# EAGLE board newbottomboard (EAGLE 9.4.1)
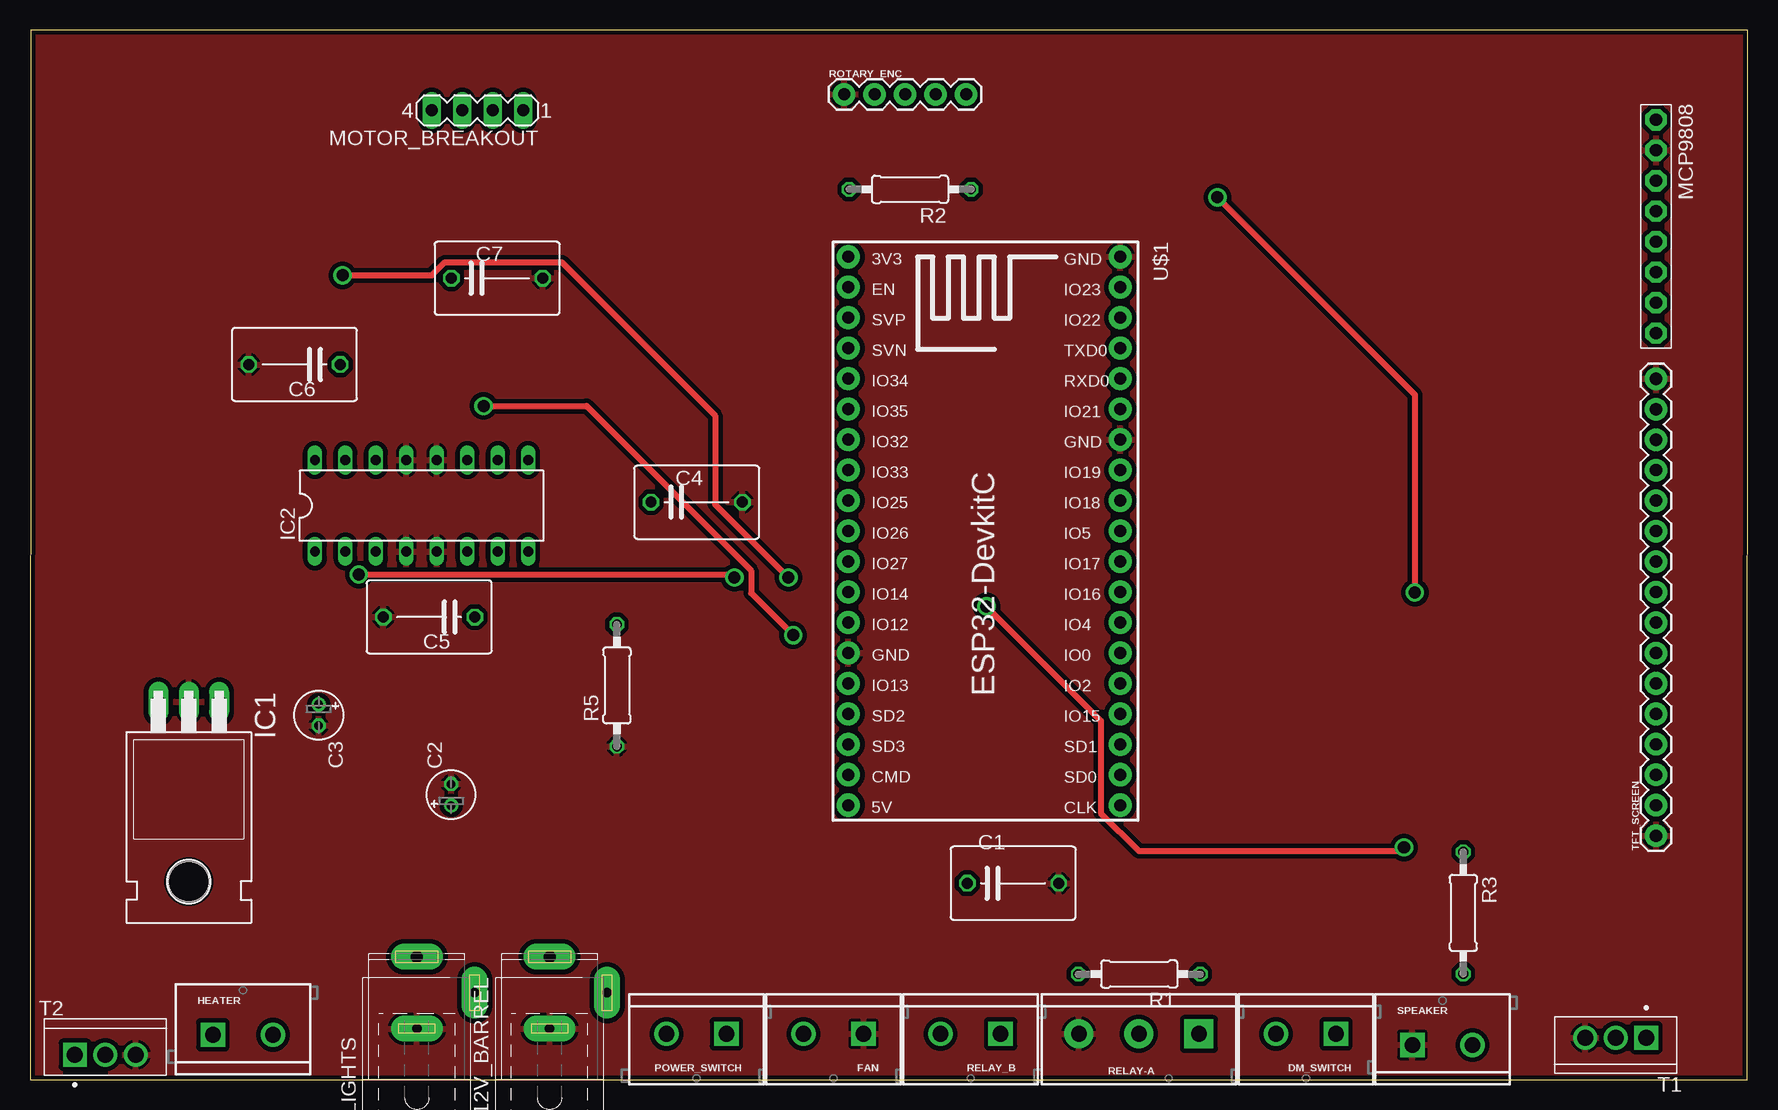
[diagram p0: board, top side]
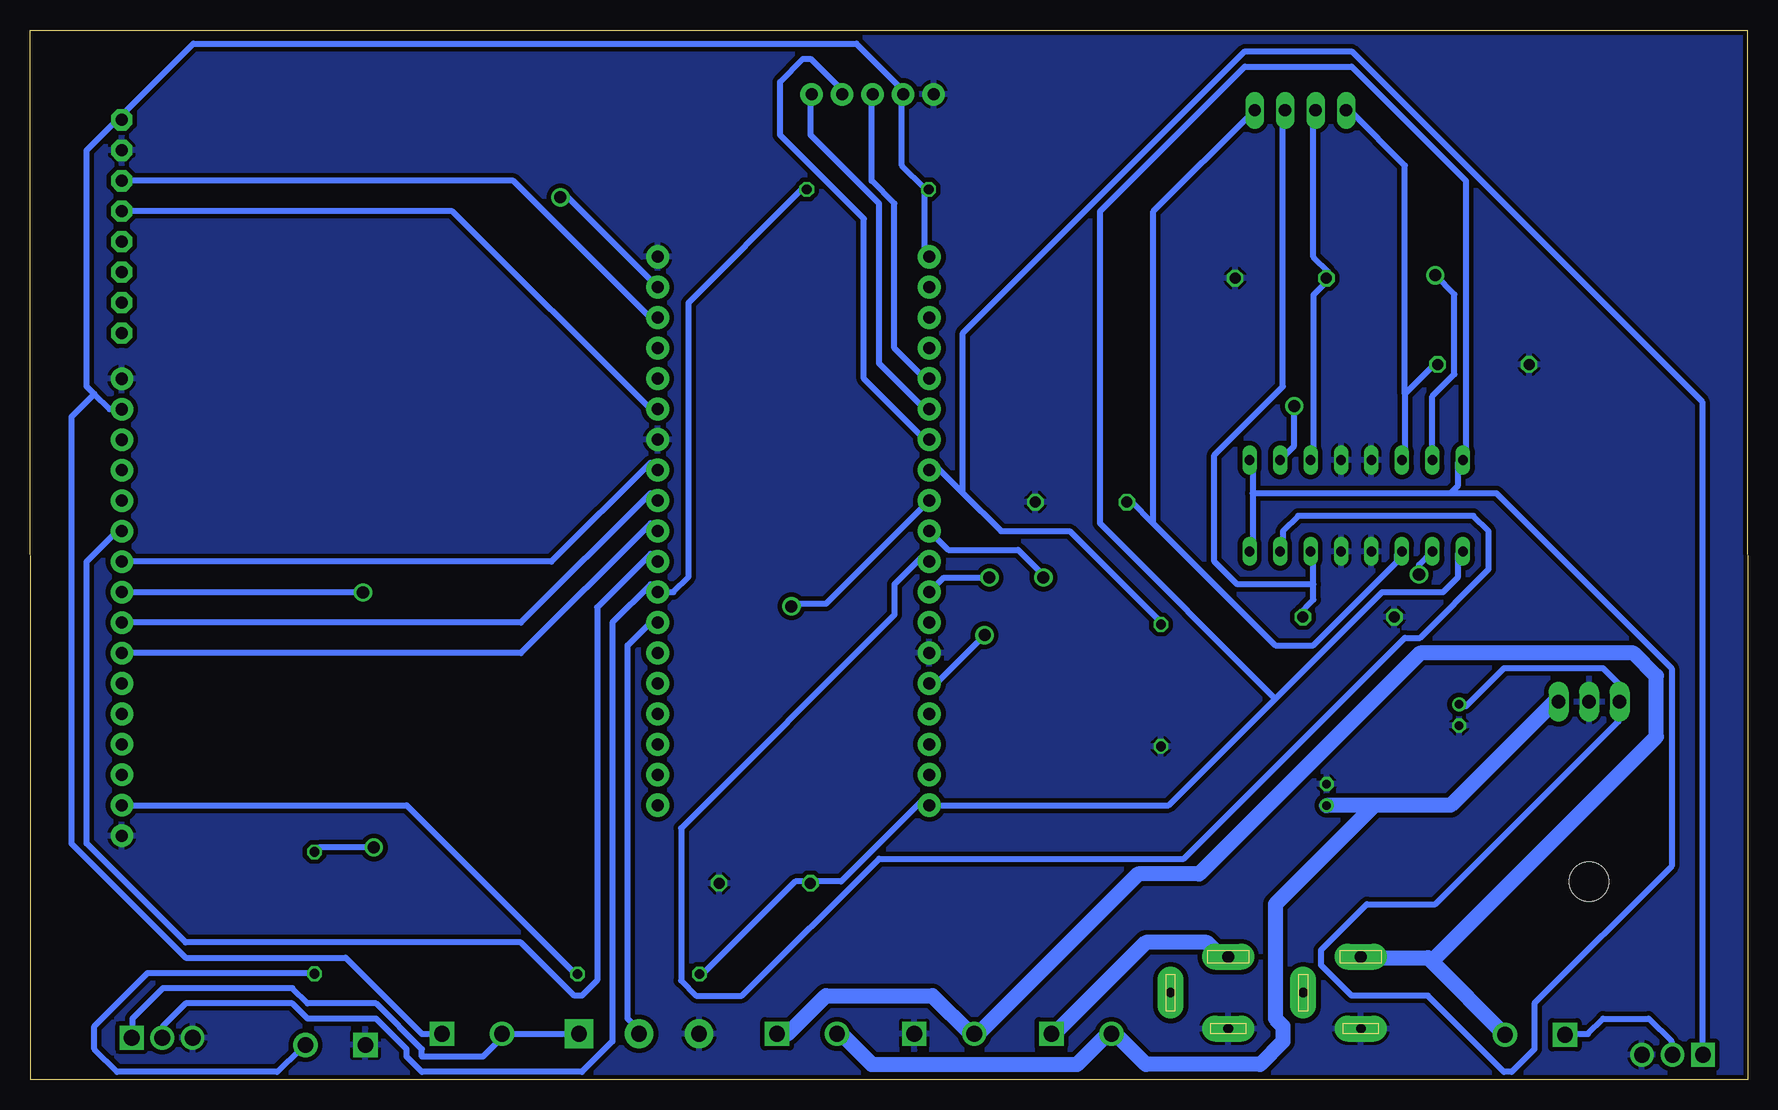
[diagram p1: board, bottom side, seen from below]

Size 143.15 x 87.5 mm. Coordinates in mm from the lower left corner, seen from the top.
Outline: 0,0 143.1,0 143.15,87.5 0.05,87.5 0,0
Copper layers (1*16): Top 0.0178mm / dielectric 59mil / Bottom 0.0178mm
Design rules "epl-lpkf": minimum track width 8mil, minimum drill 0.35mm, track to track 8mil, track to pad 8mil, pad to pad 8mil, via to via 8mil, smd to smd 8mil, copper to edge 15mil, drill to drill 15mil, minimum pad ring 8mil, minimum via ring 8mil, stop-mask expansion 3mil, vias tented up to drill 0mil, thermal gap 10mil
Net classes: 0 default: width 0.508 mm, drill 1.5 mm, clearance 0.381 mm; 1 thick: width 1.27 mm, drill 1.199 mm, clearance 0.381 mm; 2 high current: width 4.318 mm, drill 1.199 mm, clearance 0.381 mm

## Footprints (pad centres in the part's own frame; a part is rotated, then mirrored left to right if it is on the bottom)
SPC4077 = drill 0.8 pad 2.184 long: 1 -3,0; 2 0,-4.8 | drill 1 pad 2.184 long: 3 3,0
C075-063X106 = drill 0.914 octagon: 1 -3.81,0; 2 3.81,0
E1,8-4 = drill 0.711 pad 1.168: + -0.889,0 | drill 0.711 pad 1.168 octagon: - 0.889,0
SCREWTERMINAL-5MM-2 = drill 1.3 pad 2.032 square: 1 0,0 | drill 1.3 pad 2.032: 2 5,0
TO220H = drill 1.118 long: 1 -2.54,-10.16; 2 0,-10.16; 3 2.54,-10.16 | hole 3.302: 0,4.826
DIL16 = drill 0.813 long: 1 -8.89,-3.81; 2 -6.35,-3.81; 3 -3.81,-3.81; 4 -1.27,-3.81; 5 1.27,-3.81; 6 3.81,-3.81; 7 6.35,-3.81; 8 8.89,-3.81; 9 8.89,3.81; 10 6.35,3.81; 11 3.81,3.81; 12 1.27,3.81; 13 -1.27,3.81; 14 -3.81,3.81; 15 -6.35,3.81; 16 -8.89,3.81
1X08-BIG = drill 1.016 pad 1.778 octagon: 1 -8.89,0; 2 -6.35,0; 3 -3.81,0; 4 -1.27,0; 5 1.27,0; 6 3.81,0; 7 6.35,0; 8 8.89,0
MA04-1 = drill 1.016 long: 1 -3.81,0; 2 -1.27,0; 3 1.27,0; 4 3.81,0
0207/10 = drill 0.813 octagon: 1 -5.08,0; 2 5.08,0
SCREWTERMINAL-5MM-3 = drill 1.3 pad 2.413 square: 1 0,0 | drill 1.3 pad 2.413: 2 5,0; 3 10,0
1X05 = drill 1.016 pad 1.88: 1 0,0; 2 2.54,0; 3 5.08,0; 4 7.62,0; 5 10.16,0
TRANS_RFP30N06LE = drill 1.32 square: 1 -2.54,0 | drill 1.32: 2 0,0; 3 2.54,0
1X16 = drill 1.016 pad 1.88: 1 0,0; 2 2.54,0; 3 5.08,0; 4 7.62,0; 5 10.16,0; 6 12.7,0; 7 15.24,0; 8 17.78,0; 9 20.32,0; 10 22.86,0; 11 25.4,0; 12 27.94,0; 13 30.48,0; 14 33.02,0; 15 35.56,0; 16 38.1,0
ESP32-DEVKITC = drill 1 pad 1.93: 1 -22.87,-11.42; 2 -20.33,-11.42; 3 -17.79,-11.42; 4 -15.25,-11.42; 5 -12.71,-11.42; 6 -10.17,-11.42; 7 -7.63,-11.42; 8 -5.09,-11.42; 9 -2.55,-11.42; 10 -0.01,-11.42; 11 2.53,-11.42; 12 5.07,-11.42; 13 7.61,-11.42; 14 10.15,-11.42; 15 12.69,-11.42; 16 15.23,-11.42; 17 17.77,-11.42; 18 20.31,-11.42; 19 22.85,-11.42; 20 22.85,11.23; 21 20.31,11.23; 22 17.77,11.23; 23 15.23,11.23; 24 12.69,11.23; 25 10.15,11.23; 26 7.61,11.23; 27 5.07,11.23; 28 2.53,11.23; 29 -0.01,11.23; 30 -2.55,11.23; 31 -5.09,11.23; 32 -7.63,11.23; 33 -10.17,11.23; 34 -12.71,11.23; 35 -15.25,11.23; 36 -17.79,11.23; 37 -20.33,11.23; 38 -22.87,11.23

## Placement (x,y rotation side)
12V_BARREL  [SPC4077]  43.3,7.24 90 top
C1  .1uF  [C075-063X106]  81.92,16.37 0 top
C2  10uF  [E1,8-4]  35.1,23.74 90 top
C3  10uF  [E1,8-4]  24.06,30.39 270 top
C4  0.1u  [C075-063X106]  55.56,48.13 0 top
C5  0.1u  [C075-063X106]  33.26,38.56 180 top
C6  0.1u  [C075-063X106]  22.04,59.61 180 top
C7  0.1u  [C075-063X106]  38.92,66.81 0 top
DM_SWITCH  [SCREWTERMINAL-5MM-2]  108.83,3.81 180 top
FAN  [SCREWTERMINAL-5MM-2]  69.46,3.81 180 top
HEATER  [SCREWTERMINAL-5MM-2]  15.24,3.73 0 top
IC1  7805T  [TO220H]  13.23,21.33 180 top
IC2  L293D  [DIL16]  32.63,47.84 0 top
LIGHTS  [SPC4077]  32.25,7.24 90 top
MCP9808  [1X08-BIG]  135.5,71.12 270 top
MOTOR_BREAKOUT  [MA04-1]  37.29,80.8 180 top
POWER_SWITCH  [SCREWTERMINAL-5MM-2]  58.03,3.81 180 top
R1  220  [0207/10]  92.44,8.79 180 top
R2  10k  [0207/10]  73.34,74.21 180 top
R3  220  [0207/10]  119.44,13.89 270 top
R5  10k  [0207/10]  48.91,32.86 90 top
RELAY-A  [SCREWTERMINAL-5MM-3]  97.4,3.81 180 top
RELAY_B  [SCREWTERMINAL-5MM-2]  80.89,3.81 180 top
ROTARY_ENC  [1X05]  67.85,82.14 0 top
SPEAKER  [SCREWTERMINAL-5MM-2]  115.2,2.89 0 top
T1  RFP30N06LE  [TRANS_RFP30N06LE]  132.14,3.49 180 top
T2  RFP30N06LE  [TRANS_RFP30N06LE]  6.28,2.07 0 top
TFT_SCREEN  [1X16]  135.5,20.32 90 top
U$1  ESP32DEVKITC  [ESP32-DEVKITC]  79.62,45.72 270 top

## Library data of the parts
12V_BARREL LIGHTS = con-jack; OC_FARNELL: unknown; OC_NEWARK: unknown
C1-C7 = rcl; SPICEPREFIX: C
DM_SWITCH FAN HEATER POWER_SWITCH RELAY_B SPEAKER = SparkFun-Connectors; SF_SKU: PRT-08432
IC1 = linear
IC2 = st-microelectronics; MPN: L293D; OC_FARNELL: 9589619; OC_NEWARK: 56P8249
MCP9808 = adafruit
MOTOR_BREAKOUT = con-lstb; OC_FARNELL: unknown; OC_NEWARK: unknown
R1-R3 R5 = rcl; SPICEPREFIX: R
RELAY-A = SparkFun-Connectors; PROD_ID: CONN-10134; SF_SKU: PRT-08433
ROTARY_ENC TFT_SCREEN = SparkFun-Connectors
T1 T2 = RFP30N06LE; AVAILABILITY: Unavailable; MF: ON Semiconductor; MP: RFP30N06LE; PACKAGE: TO-220 Intersil; PRICE: None
U$1 = ESP32-DEVKITC

## Nets
+3V3: DM_SWITCH.1 MCP9808.1 R2.2 ROTARY_ENC.2 TFT_SCREEN.15 U$1.1
+5V: C1.1 C3.+ IC1.3 IC2.1 IC2.8 IC2.9 IC2.16 R1.2 U$1.19
GND: 12V_BARREL.1 C1.2 C2.- C3.- C4.2 C5.2 C6.2 C7.2 FAN.1 IC1.2 IC2.4 IC2.5 IC2.12 IC2.13 LIGHTS.1 MCP9808.2 R5.1 RELAY-A.3 ROTARY_ENC.1 SPEAKER.1 T1.3 T2.3 TFT_SCREEN.1 TFT_SCREEN.16 U$1.14 U$1.32 U$1.38
N$1: TFT_SCREEN.9 U$1.37
N$2: IC2.15 U$1.12
N$3 [thick]: 12V_BARREL.3 POWER_SWITCH.1
N$4: HEATER.1 T2.2
N$5: IC2.7 U$1.11
N$6: R3.2 SPEAKER.2
N$7: C5.1 IC2.6 MOTOR_BREAKOUT.2
N$8: DM_SWITCH.2 RELAY-A.1 T1.1
N$9: R2.1 T1.2 U$1.27
N$10: MCP9808.3 U$1.36
N$11: MCP9808.4 U$1.33
N$13: IC2.2 U$1.10
N$14: R5.2 T2.1 U$1.8
N$15: C4.1 IC2.3 MOTOR_BREAKOUT.1
N$16: RELAY-A.2 U$1.26
N$17: R1.1 TFT_SCREEN.2
N$18: ROTARY_ENC.3 U$1.5
N$19: ROTARY_ENC.4 U$1.7
N$20: ROTARY_ENC.5 U$1.6
N$21: TFT_SCREEN.11 U$1.28
N$22: TFT_SCREEN.10 U$1.31
N$23: C7.1 IC2.11 MOTOR_BREAKOUT.3
N$24: TFT_SCREEN.8 U$1.30
N$25: TFT_SCREEN.7 U$1.29
N$26: R3.1 U$1.9
N$27: C6.1 IC2.14 MOTOR_BREAKOUT.4
N$28 [thick]: FAN.2 HEATER.2 LIGHTS.3 RELAY_B.1
N$29: IC2.10 U$1.15
V+ [thick]: C2.+ IC1.1 POWER_SWITCH.2 RELAY_B.2

## Tracks (layer width: path | path; a pad name or v marks a point on that pad's centre or on a via)
+3V3
  Bottom 0.508: 68.58,74.3 68.58,69.22 U$1.1 | 68.58,74.3 70.48,76.2 70.48,81.92 ROTARY_ENC.2 70.48,82.55 74.3,86.36 129.54,86.36 135.89,80.01 | 68.58,74.3 R2.2 | 135.89,80.01 138.43,77.47 138.43,57.78 137.79,57.15 | 137.79,57.15 136.53,55.88 TFT_SCREEN.15 | DM_SWITCH.1 110.49,3.81 116.84,10.16 130.18,10.16 139.7,19.68 139.7,55.24 137.79,57.15 | 135.89,80.01 MCP9808.1
+5V
  Bottom 0.508: C3.+ 23.5,31.11 20.32,34.29 12.06,34.29 10.79,33.02 10.79,31.75 IC1.3 10.79,31.11 10.79,29.84 26.04,14.61 31.75,14.61 35.56,10.79 35.56,9.53 33.02,6.99 26.67,6.99 20.32,0.64 19.68,0.64 17.78,2.54 17.78,6.35 6.35,17.78 6.35,34.29 20.95,48.9 24.77,48.9 | 41.27,48.9 41.27,51.44 IC2.9 | 41.27,48.9 41.27,44.45 IC2.8 | 24.77,48.9 24.13,49.53 24.13,51.44 IC2.16 23.5,52.07 23.5,74.93 33.02,84.45 41.91,84.45 53.98,72.39 53.98,46.35 39.37,31.75 | 41.27,48.9 24.77,48.9 | R1.2 87,8.89 79.38,16.51 78.74,16.51 C1.1 78.11,16.51 75.56,16.51 68.58,23.5 U$1.19 67.94,22.86 48.26,22.86 39.37,31.75 | 39.37,31.75 30.48,40.64 25.4,40.64 24.13,41.91 24.13,43.81 IC2.1
GND
  pour Top: 0.05,87.45 0.05,0 143.1,0 143.1,87.45
  pour Bottom: 0.05,87.45 0.05,0 143.1,0 143.1,87.45
N$1  (via drill 1.02)
  Top 0.508: 99.05,73.65 v98.95,73.55 115.4,57.1 v115.4,40.6
  Bottom 0.508: U$1.37 98.35,73.55 v98.95,73.55 | 116,40.6 v115.4,40.6 135.46,40.6 TFT_SCREEN.9
N$2  (via drill 1.02)
  Top 0.508: 26.5,67.05 v26.05,67.05 33.48,67.05 34.56,68.13 44.32,68.13 57.1,55.35 57.1,47.95 v63.2,41.85
  Bottom 0.508: IC2.15 26.28,56.97 24.45,58.8 24.45,65.45 v26.05,67.05 | U$1.12 67,41.85 v63.2,41.85
N$3
  Bottom 1.27: POWER_SWITCH.1 57.78,3.81 50.16,11.43 45.09,11.43 43.81,10.16 12V_BARREL.3
N$4
  Bottom 0.508: T2.2 6.35,2.54 6.35,3.17 8.26,5.08 12.06,5.08 13.34,3.81 15.24,3.81 HEATER.1
N$5
  Bottom 0.508: IC2.7 38.73,44.45 38.73,45.72 37.47,46.99 22.86,46.99 21.59,45.72 21.59,42.55 27.3,36.83 28.57,36.83 46.99,18.41 72.39,18.41 83.82,6.99 87.63,6.99 88.9,8.26 88.9,20.95 71.12,38.73 71.12,41.27 68.58,43.81 U$1.11
N$6
  Bottom 0.508: R3.2 120.02,8.89 133.35,8.89 137.79,4.45 137.79,2.54 135.89,0.64 122.56,0.64 120.65,2.54 SPEAKER.2
N$7
  Bottom 0.508: 36.2,41.27 36.2,40.01 37.47,38.73 C5.1 | 36.2,41.27 36.2,43.81 IC2.6 | 36.2,41.27 42.55,41.27 44.45,43.18 44.45,52.07 38.73,57.78 38.73,80.64 MOTOR_BREAKOUT.2
N$8
  Bottom 0.508: 103.5,3.81 105.41,1.91 110.49,1.91 110.49,2.54 114.3,6.35 120.02,6.35 121.28,7.62 132.08,7.62 134.62,5.08 134.62,3.81 T1.1 | 103.5,3.81 RELAY-A.1 | 103.5,3.81 DM_SWITCH.2
N$9
  Bottom 0.508: R2.1 78.74,74.3 88.27,64.77 88.27,41.91 89.53,40.64 90.81,40.64 U$1.27 91.44,41.27 94.61,38.1 94.61,3.17 97.16,0.64 110.49,0.64 111.76,1.91 111.76,2.54 114.3,5.08 120.02,5.08 121.28,6.35 130.18,6.35 132.08,4.45 132.08,3.81 T1.2
N$10
  Bottom 0.508: MCP9808.3 102.87,74.93 91.44,63.5 U$1.36
N$11
  Bottom 0.508: MCP9808.4 107.95,72.39 91.44,55.88 U$1.33
N$13  (via drill 1.02)
  Top 0.508: 58.75,41.8 v58.7,41.85 58.45,42.1 v27.4,42.1 27.9,42.1
  Bottom 0.508: IC2.2 27.4,42.91 v27.4,42.1 | U$1.10 66.62,44.15 60.8,44.15 58.7,42.05 v58.7,41.85
N$14
  Bottom 0.508: 65.41,48.9 67.94,51.44 U$1.8 | 65.41,48.9 62.23,45.72 56.52,45.72 48.9,38.1 R5.2 | 65.41,48.9 65.41,62.23 41.91,85.72 33.02,85.72 3.81,56.52 3.81,2.54 T2.1
N$15
  Bottom 0.508: 49.53,46.35 51.44,48.26 C4.1 | 49.53,46.35 39.37,36.2 36.2,36.2 29.21,43.18 29.21,43.81 IC2.3 | 49.53,46.35 49.53,72.39 41.27,80.64 MOTOR_BREAKOUT.1
N$16
  Bottom 0.508: U$1.26 91.44,38.1 93.34,36.2 93.34,5.08 92.08,3.81 RELAY-A.2
N$17
  Bottom 0.508: TFT_SCREEN.2 111.76,22.86 97.79,8.89 R1.1
N$18
  Bottom 0.508: ROTARY_ENC.3 73.03,81.92 73.03,74.93 71.12,73.03 71.12,60.96 68.58,58.42 U$1.5
N$19
  Bottom 0.508: ROTARY_ENC.4 75.56,82.55 78.11,85.09 78.74,85.09 80.64,83.19 80.64,78.74 73.66,71.75 73.66,58.42 68.58,53.34 U$1.7
N$20
  Bottom 0.508: ROTARY_ENC.5 78.11,81.92 78.11,78.74 72.39,73.03 72.39,59.69 68.58,55.88 U$1.6
N$21
  Bottom 0.508: TFT_SCREEN.11 135.89,45.72 138.43,43.18 138.43,19.68 130.18,11.43 102.23,11.43 97.79,6.99 97.16,6.99 95.89,8.26 95.89,39.37 91.44,43.81 U$1.28
N$22
  Bottom 0.508: TFT_SCREEN.10 99.69,43.18 91.44,51.44 U$1.31
N$23
  Bottom 0.508: IC2.11 36.2,52.07 36.2,65.41 34.92,66.67 C7.1 34.92,67.31 36.2,68.58 36.2,80.64 MOTOR_BREAKOUT.3
N$24
  Bottom 0.508: TFT_SCREEN.8 102.23,38.1 91.44,48.9 U$1.30
N$25
  Bottom 0.508: TFT_SCREEN.7 102.23,35.56 91.44,46.35 U$1.29
N$26  (via drill 1.02)
  Top 0.508: v79.7,39.45 89.25,29.9 89.25,22.21 92.41,19.05 114.2,19.05 v114.5,19.35
  Bottom 0.508: U$1.9 76.82,39.65 79.5,39.65 v79.7,39.45 | v114.5,19.35 119.06,19.35 R3.1
N$27
  Bottom 0.508: 28.57,57.15 28.57,52.07 IC2.14 | 28.57,57.15 26.04,59.69 C6.1 | 28.57,57.15 28.57,76.2 33.02,80.64 MOTOR_BREAKOUT.4
N$28
  Bottom 1.27: RELAY_B.1 80.01,3.81 76.83,6.99 67.94,6.99 64.77,3.81 FAN.2 64.14,3.81 50.8,17.14 45.72,17.14 27.3,35.56 9.53,35.56 7.62,33.66 7.62,28.57 26.35,9.84 | 26.35,9.84 26.67,10.16 31.75,10.16 LIGHTS.3 | 26.35,9.84 HEATER.2
N$29  (via drill 1.02)
  Top 0.508: v63.6,37.05 60.1,40.55 60.1,42.43 46.38,56.15 v37.8,56.15
  Bottom 0.508: IC2.10 37.8,52.83 v37.8,56.15 | v63.6,37.05 67.62,33.03 U$1.15
V+
  Bottom 1.27: RELAY_B.2 75.56,3.81 73.03,1.27 55.88,1.27 53.34,3.81 POWER_SWITCH.2 52.7,3.81 50.16,1.27 40.64,1.27 38.73,3.17 38.73,4.45 39.37,5.08 39.37,14.61 31.11,22.86 | 31.11,22.86 24.77,22.86 15.88,31.75 IC1.1 | 31.11,22.86 34.92,22.86 C2.+